# Altium PCB {TEX137}_F2837x_controlCARD_R1.3_PCB_PADS.PcbDoc (part 3 of 6)
Units mm, origin at the board's own origin, x right, y up, seen from the top; angles counter-clockwise.
Board outline 105.77 x 51.09 mm, 10 copper layers (Primary Side, Inner Layer 2, Inner Layer 3, Inner Layer 4, Inner Layer 5, Inner Layer 6, Inner Layer 7, Inner Layer 8, Inner Layer 9, Secondary Side), stack 1.634 mm thick; 292 components, 317 nets, 1400 pads, 1032 vias.
Unrouted connection lines stored in the file: 106.
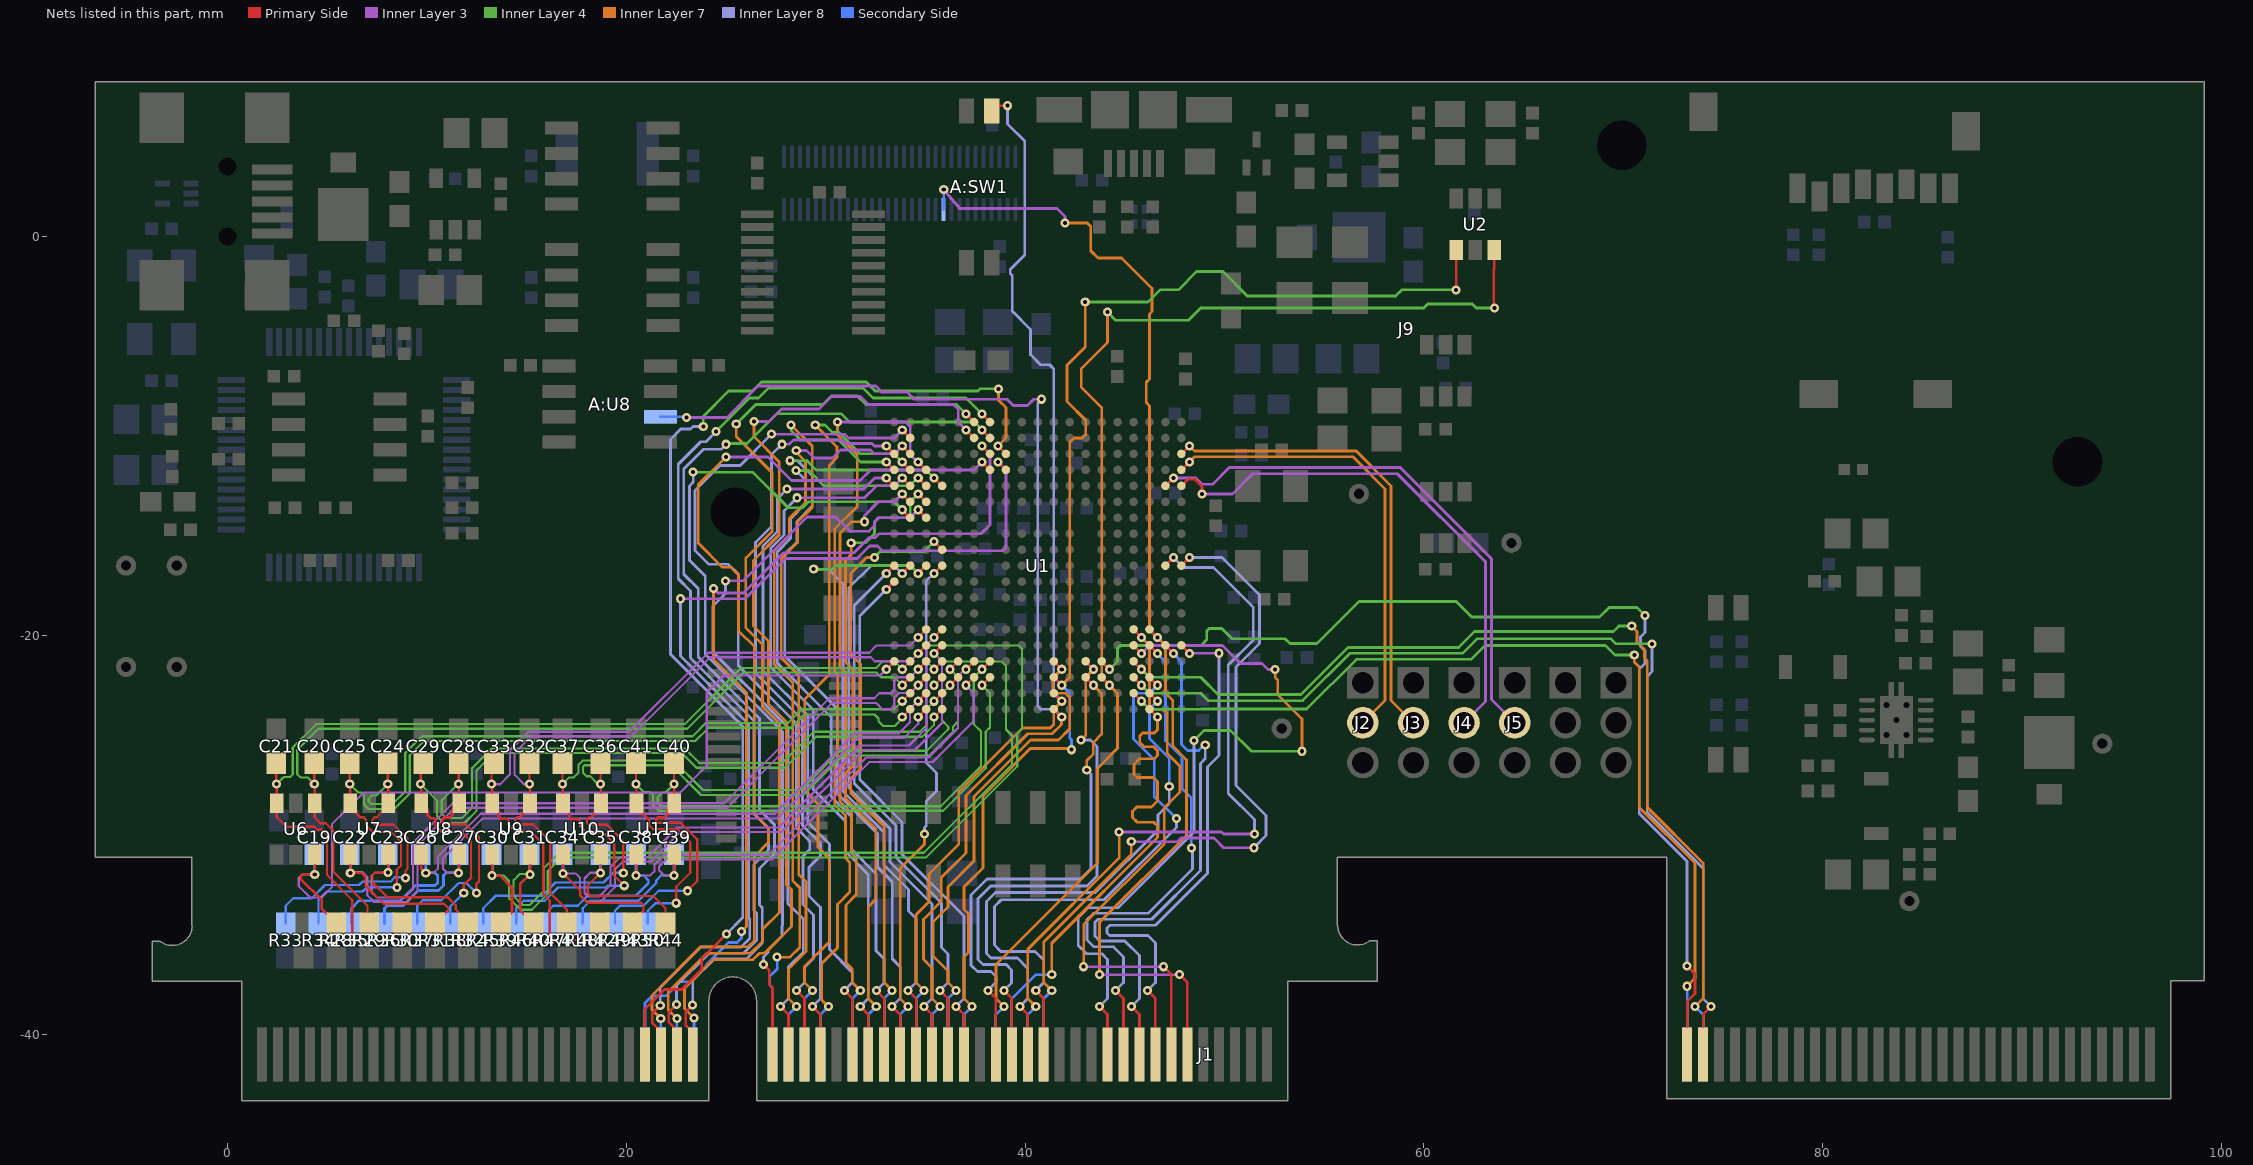
[diagram p11: the nets of this part, all layers, seen from the top]

## Via types
v1: diameter 0.457, hole 0.203, Primary Side to Secondary Side, 1025 vias
v2: diameter 0.711, hole 0.254, Primary Side to Secondary Side, 7 vias

## Nets (pads, with @x,y where several pads share a name; then routed paths per layer and width w, separated by ;. In a path a pad name is that pad's centre, name@x,y a point inside that pad or via, vN(x,y) a via of type N, cw(c..) or ccw(c..) an arc to the next point about the centre after c; other vN are vias at no path point) (continued)
MCU_ADC-A1: C19.2 R28.2 U1.T1 U6.3 | length 46.1
  Primary Side w0.114: v1(4.379,-32.004) U6.3@4.379,-31.013
  Primary Side w0.135: v1(4.379,-32.004) 4.357,-31.991 3.773,-31.991 3.671,-32.092 3.671,-32.219 4.738,-33.286 4.738,-33.732 R28.2@5.461,-34.455 ; v1(33.04,-21.71) U1.T1@33.44,-21.31
  Inner Layer 3 w0.109: v1(4.379,-32.004) 3.747,-32.004 3.581,-32.17 3.581,-32.588 4.14,-33.147 4.724,-33.147 5.237,-32.634 5.237,-29.487 6.834,-27.889 22.702,-27.889 24.041,-26.55 24.041,-22.873 24.892,-22.022 32.728,-22.022 v1(33.04,-21.71)
  Secondary Side w0.135: C19.2@4.357,-30.989 4.379,-31.519 v1(4.379,-32.004)
MCU_ADC-A2: C20.2 R29.2 U1.U2 U6.4 | length 44.4
  Primary Side w0.114: U6.4@4.379,-28.423 4.379,-29.143 4.662,-29.425 4.936,-29.425 5.322,-29.811 5.322,-31.865 7.024,-33.567 7.024,-34.367 R29.2@7.112,-34.455
  Primary Side w0.135: C20.2@4.357,-26.417 v1(4.357,-27.471) 4.379,-27.493 U6.4@4.379,-28.423 ; v1(33.84,-22.51) U1.U2@34.24,-22.11
  Inner Layer 4 w0.109: v1(4.357,-27.471) 4.026,-27.14 3.67,-27.14 3.505,-26.975 3.505,-25.756 4.572,-24.689 23.063,-24.689 25.883,-21.869 32.537,-21.869 32.778,-22.11 33.44,-22.11 v1(33.84,-22.51)
MCU_ADC-A3: C21.2 R30.2 U1.T2 U6.6 | length 49.7
  Primary Side w0.114: C21.2@2.452,-26.417 v1(2.452,-27.471) 2.479,-27.498 U6.6@2.479,-28.423 ; U6.6@2.479,-28.36 U6.6@2.479,-28.423 ; R30.2@8.763,-34.455 7.873,-35.345 6.516,-35.345 6.262,-35.091 6.262,-33.286 4.992,-32.016 4.992,-30.011 4.738,-29.757 4.511,-29.757 4.357,-29.603 2.96,-29.603 2.479,-29.122 U6.6@2.479,-28.423 ; v1(33.84,-21.71) U1.T2@34.24,-21.31
  Inner Layer 4 w0.109: v1(2.452,-27.471) 2.808,-27.115 3.136,-27.115 3.277,-26.975 3.277,-25.63 4.447,-24.46 22.936,-24.46 25.756,-21.641 32.537,-21.641 32.868,-21.31 33.44,-21.31 v1(33.84,-21.71)
MCU_ADC-A4: C22.2 R31.2 U1.U3 U7.1 | length 45.5
  Primary Side w0.114: U7.1@6.162,-31.013 v1(6.162,-31.916) 6.718,-31.916 6.923,-32.121 6.923,-32.55 7.837,-33.464 10.859,-33.464 11.088,-33.693 11.088,-33.769 10.656,-34.201 10.414,-34.201 R31.2@10.414,-34.455
  Primary Side w0.135: v1(34.64,-22.51) U1.U3@35.04,-22.11
  Inner Layer 3 w0.109: v1(6.162,-31.916) 6.189,-31.889 6.782,-31.889 7.01,-32.118 7.01,-33.038 7.348,-33.376 8.992,-33.376 9.539,-32.829 9.539,-30.518 11.405,-28.651 25.07,-28.651 30.328,-23.393 32.524,-23.393 32.842,-23.711 33.312,-23.711 33.44,-23.583 33.44,-23.151 33.694,-22.897 34.253,-22.897 v1(34.64,-22.51)
  Secondary Side w0.135: C22.2@6.135,-30.989 6.162,-31.016 v1(6.162,-31.916)
MCU_ADC-A5: C23.2 R32.2 U1.T3 U7.3 | length 45.1
  Primary Side w0.114: U7.3@8.062,-31.013 v1(8.062,-31.905) 8.062,-31.915 7.405,-31.915 7.278,-32.042 7.278,-32.397 8.015,-33.134 11.037,-33.134 11.444,-33.54 11.444,-33.743 12.104,-34.404 12.104,-34.416 R32.2@12.065,-34.455
  Primary Side w0.135: v1(34.64,-21.71) U1.T3@35.04,-21.31
  Inner Layer 3 w0.109: v1(8.062,-31.905) 7.401,-31.905 7.239,-32.067 7.239,-32.905 7.481,-33.147 8.89,-33.147 9.31,-32.727 9.31,-30.416 11.303,-28.423 24.917,-28.423 30.18,-23.16 32.443,-23.16 32.69,-22.913 33.297,-22.913 33.44,-22.771 33.44,-22.275 33.609,-22.106 34.244,-22.106 v1(34.64,-21.71)
  Secondary Side w0.135: C23.2@8.04,-30.989 8.062,-30.989 v1(8.062,-31.905)
MCU_ADC-B0: C24.2 R33.2 U1.V2 U7.4 | length 47
  Primary Side w0.114: C24.2@8.04,-26.417 v1(8.04,-27.471) 8.062,-27.493 U7.4@8.062,-28.423 8.062,-28.563 7.49,-29.135 7.392,-29.135 7.278,-29.249 7.278,-29.376 7.405,-29.503 8.346,-29.503 9.031,-30.187 9.031,-31.711 8.929,-31.813 v1(8.929,-32.169) ; v1(33.84,-23.31) U1.V2@34.24,-22.91
  Inner Layer 4 w0.109: v1(8.04,-27.471) 7.469,-28.043 7.239,-28.043 7.087,-28.195 7.087,-28.346 7.199,-28.459 8.294,-28.459 8.915,-27.837 8.915,-25.908 9.754,-25.07 23.33,-25.07 24.003,-24.397 28.13,-24.397 28.817,-23.71 33.44,-23.71 v1(33.84,-23.31)
  Secondary Side w0.114: R33.2@2.921,-34.455 2.921,-33.567 3.302,-33.186 4.23,-33.186 4.891,-32.525 6.604,-32.525 6.782,-32.346 8.192,-32.346 8.396,-32.143 8.904,-32.143 v1(8.929,-32.169)
MCU_ADC-B1: C25.2 R34.2 U1.W2 U7.6 | length 46.1
  Primary Side w0.114: C25.2@6.135,-26.417 v1(6.135,-27.471) 6.162,-27.498 U7.6@6.162,-28.423 6.162,-28.641 6.643,-29.122 6.821,-29.122 6.948,-29.249 6.948,-29.527 7.278,-29.857 8.218,-29.857 8.7,-30.34 8.7,-31.559 8.497,-31.762 v1(8.497,-32.651) ; v1(33.84,-24.11) U1.W2@34.24,-23.71
  Inner Layer 4 w0.109: v1(6.135,-27.471) 6.553,-27.889 6.706,-27.889 6.846,-28.03 6.846,-28.487 7.073,-28.714 8.37,-28.714 9.144,-27.94 9.144,-26.023 9.869,-25.298 23.47,-25.298 24.13,-24.638 28.27,-24.638 28.931,-23.978 32.449,-23.978 32.653,-24.181 32.653,-24.321 32.88,-24.549 33.465,-24.549 33.872,-24.142 v1(33.84,-24.11)
  Secondary Side w0.114: R34.2@4.572,-34.455 4.572,-33.274 4.991,-32.855 6.769,-32.855 6.985,-32.639 8.485,-32.639 v1(8.497,-32.651)
MCU_ADC-B2: C26.2 R35.2 U1.V3 U8.1 | length 38.2
  Primary Side w0.135: U8.1@9.718,-31.013 9.718,-31.689 v1(9.945,-31.916) ; v1(34.64,-23.31) U1.V3@35.04,-22.91
  Inner Layer 3 w0.109: v1(9.945,-31.916) 10.351,-31.916 10.555,-31.713 10.555,-31.103 12.702,-28.956 27.432,-28.956 31.471,-24.917 33.681,-24.917 34.227,-24.371 34.227,-23.686 34.604,-23.31 v1(34.64,-23.31)
  Secondary Side w0.135: R35.2@6.223,-34.455 6.223,-33.694 6.604,-33.313 8.675,-33.313 9.437,-32.551 10.414,-32.551 10.541,-32.424 10.541,-32.043 10.414,-31.916 v1(9.945,-31.916) 9.945,-31.243 C26.2@9.691,-30.989
MCU_ADC-B3: C27.2 R36.2 U1.W3 U8.3 | length 36.3
  Primary Side w0.135: v1(11.596,-31.916) 11.618,-31.894 U8.3@11.618,-31.013 ; v1(34.64,-24.11) U1.W3@35.04,-23.71
  Inner Layer 3 w0.109: v1(11.596,-31.916) 11.013,-31.916 10.809,-31.711 10.809,-31.178 12.802,-29.185 27.584,-29.185 31.623,-25.146 33.937,-25.146 34.64,-24.443 v1(34.64,-24.11)
  Secondary Side w0.135: R36.2@7.874,-34.455 7.874,-33.694 8.001,-33.567 8.802,-33.567 9.564,-32.805 10.58,-32.805 10.834,-32.551 10.834,-32.043 10.961,-31.916 v1(11.596,-31.916) C27.2@11.596,-30.989
MCU_ADC-B4: C28.2 R37.2 U1.V4 U8.4 | length 44.9
  Primary Side w0.114: v1(11.596,-27.471) 11.618,-27.493 U8.4@11.618,-28.423 ; 11.952,-29.476 12.612,-30.137 12.612,-32.346 12.485,-32.473 v1(12.485,-32.932) ; v1(35.44,-23.31) U1.V4@35.84,-22.91
  Primary Side w0.135: v1(11.596,-27.471) C28.2@11.596,-26.417 ; U8.4@11.618,-28.423 11.291,-28.749 11.291,-29.019 11.164,-29.146 10.859,-29.146 10.783,-29.222 10.783,-29.41 10.849,-29.476 11.952,-29.476
  Inner Layer 4 w0.109: v1(11.596,-27.471) 11.569,-27.444 10.744,-28.269 10.744,-28.955 10.961,-29.171 11.748,-29.171 12.268,-28.651 12.268,-26.67 13.259,-25.679 22.936,-25.679 23.66,-26.403 27.833,-26.403 29.395,-24.841 34.722,-24.841 35.04,-24.523 35.04,-23.71 v1(35.44,-23.31)
  Secondary Side w0.114: R37.2@9.525,-34.455 9.525,-33.567 9.798,-33.294 10.727,-33.294 11.596,-32.424 11.977,-32.424 v1(12.485,-32.932)
MCU_ADC-B5: C29.2 R38.2 U1.W4 U8.6 | length 42.2
  Primary Side w0.114: v1(9.691,-27.471) 9.718,-27.498 U8.6@9.718,-28.423 ; 11.723,-29.832 12.218,-30.327 12.218,-32.169 ; v1(35.44,-24.11) U1.W4@35.84,-23.71
  Primary Side w0.135: v1(9.691,-27.471) 9.691,-26.417 C29.2@9.818,-26.417 ; U8.6@9.718,-28.423 10.021,-28.726 10.021,-29.019 10.174,-29.171 10.351,-29.171 10.453,-29.273 10.453,-29.603 10.682,-29.832 11.723,-29.832 ; v1(11.85,-32.932) 11.85,-32.537 12.218,-32.169
  Inner Layer 4 w0.109: v1(9.691,-27.471) 10.516,-28.296 10.516,-29.088 10.841,-29.413 11.887,-29.413 12.497,-28.804 12.497,-26.765 13.354,-25.908 22.784,-25.908 23.52,-26.645 27.966,-26.645 29.515,-25.095 34.836,-25.095 35.44,-24.491 v1(35.44,-24.11)
  Secondary Side w0.114: R38.2@11.176,-34.455 11.176,-33.606 v1(11.85,-32.932)
MCU_ADC-C2: C32.2 R41.2 U1.R3 U9.4 | length 35
  Primary Side w0.114: C32.2@15.152,-26.417 v1(15.152,-27.471) 15.174,-27.493 U9.4@15.174,-28.423 14.873,-28.724 14.873,-28.917 14.669,-29.121 14.542,-29.121 14.441,-29.222 14.441,-29.375 14.542,-29.476 15.33,-29.476 16.186,-30.332 16.186,-32.923 17.018,-33.755 R41.2@17.018,-34.455 ; v1(34.64,-20.91) U1.R3@35.04,-20.51
  Inner Layer 3 w0.109: v1(15.152,-27.471) 14.874,-27.471 14.402,-26.999 14.402,-25.908 15.24,-25.07 20.244,-25.07 24.206,-21.107 32.258,-21.107 32.461,-21.31 34.24,-21.31 v1(34.64,-20.91)
MCU_ADC-C3: C33.2 R42.2 U1.P3 U9.6 | length 39.7
  Primary Side w0.114: C33.2@13.374,-26.417 13.247,-26.544 v1(13.247,-27.471) 13.274,-27.498 U9.6@13.274,-28.423 13.577,-28.726 13.577,-29.07 13.704,-29.197 14.009,-29.197 14.085,-29.273 14.085,-29.502 14.39,-29.806 15.177,-29.806 15.838,-30.467 15.838,-32.981 16.168,-33.312 16.168,-35.052 16.422,-35.306 18.581,-35.306 18.669,-35.218 R42.2@18.669,-34.455 ; v1(34.64,-20.11) U1.P3@35.04,-19.71
  Inner Layer 3 w0.109: v1(13.247,-27.471) 13.677,-27.471 14.173,-26.975 14.173,-25.756 15.088,-24.841 20.142,-24.841 24.105,-20.879 32.182,-20.879 32.55,-20.51 34.24,-20.51 v1(34.64,-20.11)
MCU_ADC-C4: C34.2 R43.2 U1.R4 U10.1 | length 36.5
  Primary Side w0.114: U10.1@16.83,-31.013 v1(16.83,-31.943) 17.692,-32.805 17.692,-33.059 18.046,-33.413 20.74,-33.413 20.867,-33.54 20.867,-33.821 20.276,-34.412 R43.2@20.32,-34.455
  Primary Side w0.135: v1(35.44,-20.91) U1.R4@35.84,-20.51
  Inner Layer 3 w0.109: v1(16.83,-31.943) 17.465,-31.943 17.678,-32.156 17.678,-33.034 17.998,-33.353 18.725,-33.353 19.431,-32.647 19.431,-31.75 19.826,-31.356 21.223,-31.356 22.708,-29.87 27.788,-29.87 31.902,-25.756 34.481,-25.756 35.837,-24.4 35.837,-21.307 v1(35.44,-20.91)
  Secondary Side w0.135: C34.2@16.803,-30.989 16.83,-31.016 v1(16.83,-31.943)
MCU_ADC-C5: C35.2 R44.2 U1.P4 U10.3 | length 36.3
  Primary Side w0.114: U10.3@18.73,-31.013 18.708,-31.035 v1(18.708,-31.916) 18.073,-32.551 18.073,-32.932 18.224,-33.083 21.36,-33.083 21.971,-33.694 R44.2@21.971,-34.455
  Primary Side w0.135: v1(35.44,-20.11) U1.P4@35.84,-19.71
  Inner Layer 3 w0.109: v1(18.708,-31.916) 18.187,-31.916 17.907,-32.196 17.907,-32.93 18.085,-33.108 18.631,-33.108 19.202,-32.537 19.202,-31.623 19.698,-31.127 21.085,-31.127 22.571,-29.642 27.635,-29.642 31.75,-25.527 34.181,-25.527 35.04,-24.668 35.04,-20.51 v1(35.44,-20.11)
  Secondary Side w0.135: v1(18.708,-31.916) C35.2@18.708,-30.989
MCU_ADC-D0: C36.2 R45.2 U1.T5 U10.4 | length 41.8
  Primary Side w0.114: C36.2@18.708,-26.417 v1(18.708,-27.471) 18.73,-27.493 U10.4@18.73,-28.423 18.73,-28.816 18.403,-28.816 18.403,-28.968 18.225,-29.146 18.124,-29.146 18.029,-29.241 18.029,-29.406 18.124,-29.502 19.038,-29.502 19.851,-30.314 v1(19.851,-31.916) ; v1(36.24,-21.71) U1.T5@36.64,-21.31
  Inner Layer 4 w0.109: v1(18.708,-27.471) 18.681,-27.444 18.556,-27.444 18.187,-27.076 18.008,-27.076 17.831,-26.899 17.831,-26.594 17.907,-26.518 22.25,-26.518 23.749,-28.016 28.862,-28.016 30.841,-26.037 35.177,-26.037 36.393,-24.821 36.393,-24.577 36.64,-24.329 36.64,-22.111 v1(36.24,-21.71)
  Secondary Side w0.114: R45.2@12.827,-34.455 12.827,-33.694 13.462,-33.059 15.787,-33.059 16.449,-32.397 18.862,-32.397 19.343,-31.916 v1(19.851,-31.916)
MCU_ADC-D1: C37.2 R46.2 U1.U5 U10.6 | length 39.8
  Primary Side w0.114: C37.2@16.803,-26.417 v1(16.803,-27.471) 16.83,-27.498 U10.6@16.83,-28.423 17.133,-28.726 17.133,-29.095 17.26,-29.222 17.59,-29.222 17.692,-29.324 17.692,-29.578 17.997,-29.883 18.834,-29.883 19.394,-30.443 19.394,-32.057 v1(19.899,-32.562) ; v1(36.24,-22.51) U1.U5@36.64,-22.11
  Inner Layer 4 w0.109: v1(16.803,-27.471) 17.146,-27.128 17.373,-27.128 17.602,-26.899 17.602,-26.498 17.812,-26.289 22.377,-26.289 23.851,-27.762 28.755,-27.762 30.724,-25.793 35.067,-25.793 36.144,-24.716 36.144,-24.587 35.837,-24.28 35.837,-22.913 v1(36.24,-22.51)
  Secondary Side w0.114: R46.2@14.478,-34.455 14.478,-33.694 14.859,-33.313 15.914,-33.313 16.576,-32.651 18.987,-32.651 19.076,-32.562 v1(19.899,-32.562)
MCU_ADC-D2: C38.2 R47.2 U1.T6 U11.1 | length 32.3
  Primary Side w0.114: v1(20.486,-32.043) 20.513,-32.016 U11.1@20.513,-31.013 ; v1(37.04,-21.71) U1.T6@37.44,-21.31
  Inner Layer 3 w0.109: v1(20.486,-32.043) 21.209,-32.043 21.412,-31.84 21.412,-31.508 21.907,-31.013 27.153,-31.013 32.029,-26.137 35.154,-26.137 36.64,-24.65 36.64,-22.061 36.991,-21.71 v1(37.04,-21.71)
  Secondary Side w0.114: R47.2@16.129,-34.455 16.129,-33.771 16.333,-33.567 17.565,-33.567 18.073,-33.059 20.486,-33.059 21.121,-32.424 21.121,-32.297 20.867,-32.043 v1(20.486,-32.043)
  Secondary Side w0.135: v1(20.486,-32.043) C38.2@20.486,-30.989
MCU_ADC-D3: C39.2 R48.2 U1.U6 U11.3 | length 30.6
  Primary Side w0.114: v1(22.391,-32.043) 22.413,-32.021 U11.3@22.413,-31.013 ; v1(37.04,-22.51) U1.U6@37.44,-22.11
  Inner Layer 3 w0.109: v1(22.391,-32.043) 21.895,-32.043 21.641,-31.789 21.641,-31.609 22.008,-31.242 27.305,-31.242 32.182,-26.365 35.357,-26.365 37.397,-24.325 37.397,-24.264 37.428,-24.234 37.428,-22.898 v1(37.04,-22.51)
  Secondary Side w0.114: R48.2@17.78,-34.455 17.819,-34.416 17.819,-33.694 18.2,-33.313 20.613,-33.313 21.502,-32.424 21.502,-32.297 21.756,-32.043 v1(22.391,-32.043)
  Secondary Side w0.135: v1(22.391,-32.043) C39.2@22.391,-30.989
MCU_ADC-D4: C40.2 R49.2 U1.T7 U11.4 | length 37.7
  Primary Side w0.114: C40.2@22.391,-26.417 v1(22.391,-27.471) 22.413,-27.471 U11.4@22.413,-28.423 ; 22.721,-29.4 23.559,-30.238 23.559,-32.321 v1(23.063,-32.817) ; v1(37.84,-21.71) U1.T7@38.24,-21.31
  Primary Side w0.135: U11.4@22.413,-28.423 22.086,-28.749 22.086,-28.968 21.908,-29.146 21.578,-29.146 21.502,-29.222 21.502,-29.349 21.554,-29.4 22.721,-29.4
  Inner Layer 4 w0.109: v1(22.391,-27.471) 21.973,-27.889 21.807,-27.889 21.578,-28.118 21.578,-28.423 21.731,-28.575 35.777,-28.575 37.795,-26.557 37.795,-24.828 37.428,-24.46 37.428,-22.122 v1(37.84,-21.71)
  Secondary Side w0.114: R49.2@19.431,-34.455 19.431,-33.821 19.685,-33.567 20.867,-33.567 21.629,-32.817 v1(23.063,-32.817)
MCU_ADC-D5: C41.2 R50.2 U1.U7 U11.6 | length 35.6
  Primary Side w0.114: C41.2@20.486,-26.417 v1(20.486,-27.471) 20.513,-27.498 U11.6@20.513,-28.423 20.816,-28.726 20.816,-28.943 21.146,-29.273 21.146,-29.527 21.349,-29.73 22.569,-29.73 23.204,-30.365 23.204,-31.914 22.504,-32.614 v1(22.504,-33.44) ; v1(37.84,-22.51) U1.U7@38.24,-22.11
  Inner Layer 4 w0.109: v1(20.486,-27.471) 20.892,-27.877 21.196,-27.877 21.336,-28.017 21.336,-28.511 21.629,-28.804 35.89,-28.804 38.024,-26.67 38.024,-24.842 38.241,-24.625 38.241,-22.911 v1(37.84,-22.51)
  Secondary Side w0.114: R50.2@21.082,-34.455 21.082,-33.821 21.463,-33.44 v1(22.504,-33.44)
MCU_ADCIN14: C30.2 R39.2 U1.T4 U9.1 | length 49.3
  Primary Side w0.114: v1(13.274,-32.043) U9.1@13.274,-31.013 ; v1(35.44,-21.71) U1.T4@35.84,-21.31
  Primary Side w0.135: v1(13.274,-32.043) 13.286,-32.055 13.665,-32.055 14.275,-32.664 14.275,-33.896 R39.2@13.716,-34.455
  Inner Layer 4 w0.109: v1(13.274,-32.043) 13.843,-32.043 14.122,-32.322 14.122,-33.197 14.694,-33.769 15.265,-33.769 16.066,-32.969 16.066,-31.826 16.751,-31.14 35.039,-31.14 39.604,-26.576 39.604,-24.955 39.84,-24.719 39.84,-20.663 39.688,-20.511 35.217,-20.511 35.039,-20.688 35.039,-21.309 v1(35.44,-21.71)
  Secondary Side w0.114: C30.2@13.247,-30.989 13.274,-31.016 v1(13.274,-32.043)
MCU_ADCIN15: C31.2 R40.2 U1.U4 U9.3 | length 45.8
  Primary Side w0.114: v1(35.44,-22.51) U1.U4@35.84,-22.11
  Primary Side w0.135: U9.3@15.174,-31.013 15.174,-31.902 15.265,-31.902 v1(15.164,-32.004) 14.681,-32.487 14.681,-33.769 R40.2@15.367,-34.455
  Inner Layer 4 w0.109: v1(15.164,-32.004) 15.138,-31.979 14.655,-31.979 14.351,-32.283 14.351,-33.083 14.796,-33.528 15.163,-33.528 15.837,-32.854 15.837,-31.711 16.637,-30.911 34.925,-30.911 39.34,-26.497 39.34,-25.029 39.04,-24.729 39.04,-21.539 38.811,-21.311 36.017,-21.311 35.839,-21.488 35.839,-22.111 v1(35.44,-22.51)
  Secondary Side w0.135: C31.2@15.152,-30.989 15.164,-31.001 v1(15.164,-32.004)
MCU_GPIO-00: J1.49 U1.C8 | length 56.8
  Primary Side w0.135: J1.49@20.935,-41.024 20.935,-38.755 21.92,-37.77 22.76,-37.77 23.788,-36.742 23.788,-36.207 v1(25.02,-34.975) ; v1(38.64,-10.51) U1.C8@39.04,-10.91
  Inner Layer 4 w0.14: v1(23.864,-9.537) 23.864,-9.029 25.134,-7.759 26.339,-7.759 26.789,-7.309 32.036,-7.309 32.486,-7.759 37.63,-7.759 37.743,-7.646 v1(38.671,-7.646)
  Inner Layer 7 w0.14: v1(38.64,-10.51) 39.04,-10.11 39.04,-8.586 38.671,-8.217 v1(38.671,-7.646)
  Inner Layer 8 w0.14: v1(23.864,-9.537) 23.356,-9.537 23.229,-9.664 22.734,-9.664 22.212,-10.186 22.212,-20.955 25.845,-24.587 25.845,-34.151 v1(25.02,-34.975)
MCU_GPIO-01: J1.51 U1.D8 | length 50.3
  Primary Side w0.135: v1(21.705,-38.569) 21.299,-38.976 21.299,-39.429 21.735,-39.865 J1.51@21.735,-41.024 ; v1(38.64,-11.31) U1.D8@39.04,-11.71
  Inner Layer 3 w0.14: v1(22.721,-18.173) 25.961,-18.173 27.979,-16.155 31.571,-16.155 32.195,-15.531 32.601,-15.531 32.83,-15.76 38.887,-15.76 39.04,-15.607 39.04,-11.71 v1(38.64,-11.31)
  Inner Layer 8 w0.14: v1(21.705,-38.569) 21.705,-37.674 23.74,-35.639 25.76,-35.639 26.194,-35.204 26.194,-34.227 26.124,-34.156 26.124,-24.447 22.721,-21.045 v1(22.721,-18.173)
MCU_GPIO-02: J1.53 U1.A7 | length 52.8
  Primary Side w0.135: v1(22.518,-38.519) 22.137,-38.9 22.137,-39.416 22.535,-39.814 J1.53@22.535,-41.024 ; v1(37.84,-8.91) U1.A7@38.24,-9.31
  Inner Layer 4 w0.14: v1(24.499,-9.791) 26.187,-8.103 26.639,-8.103 27.132,-7.609 31.879,-7.609 32.372,-8.103 37.033,-8.103 v1(37.84,-8.91)
  Inner Layer 8 w0.14: v1(22.518,-38.519) 22.518,-37.566 24.137,-35.947 25.884,-35.947 26.543,-35.287 26.543,-33.947 26.403,-33.807 26.403,-31.496 27.127,-30.772 27.127,-29.68 26.403,-28.956 26.403,-24.308 23.229,-21.134 23.229,-17.792 22.607,-17.17 22.607,-11.429 23.737,-10.299 23.991,-10.299 v1(24.499,-9.791)
MCU_GPIO-03: J1.55 U1.B7 | length 51.3
  Primary Side w0.135: v1(23.331,-38.544) 22.99,-38.885 22.99,-39.57 23.335,-39.916 J1.55@23.335,-41.024 ; v1(37.84,-9.71) U1.B7@38.24,-10.11
  Inner Layer 4 w0.14: v1(25.007,-10.426) 25.007,-10.389 26.06,-10.389 27.558,-8.891 30.772,-8.891 31.192,-9.31 37.477,-9.31 v1(37.84,-9.71)
  Inner Layer 8 w0.14: v1(23.331,-38.544) 23.331,-37.325 24.423,-36.233 26.023,-36.233 26.822,-35.433 26.822,-33.668 26.683,-33.528 26.683,-31.699 27.432,-30.95 27.432,-29.502 26.683,-28.753 26.683,-24.168 23.61,-21.095 23.61,-17.665 22.886,-16.941 22.886,-11.658 23.864,-10.68 24.753,-10.68 v1(25.007,-10.426)
MCU_GPIO-04: J1.50 U1.C7 | length 47.2
  Primary Side w0.135: v1(37.84,-10.51) U1.C7@38.24,-10.91
  Inner Layer 3 w0.14: v1(24.372,-17.665) 24.589,-17.882 25.87,-17.882 27.89,-15.863 31.42,-15.863 32.169,-15.113 32.474,-15.113 32.677,-14.91 37.795,-14.91 38.24,-14.465 38.24,-10.91 v1(37.84,-10.51)
  Inner Layer 7 w0.14: v1(24.372,-17.665) 24.372,-21.209 26.035,-22.872 26.035,-34.608 v1(25.776,-34.867)
  Secondary Side w0.135: J1.50@20.937,-41.024 20.937,-39.159 20.943,-39.154 20.943,-38.442 21.299,-38.087 21.985,-38.087 22.696,-37.376 23.204,-37.376 24.017,-36.563 24.017,-36.518 25.128,-35.407 25.56,-35.407 25.776,-35.191 v1(25.776,-34.867)
MCU_GPIO-05: J1.52 U1.D7 | length 50.5
  Primary Side w0.135: v1(37.84,-11.31) U1.D7@38.24,-11.71
  Inner Layer 3 w0.14: v1(25.007,-11.061) 27.114,-11.061 28.296,-12.243 31.725,-12.243 32.258,-11.709 37.441,-11.709 v1(37.84,-11.31)
  Inner Layer 7 w0.14: v1(21.731,-39.23) 21.285,-38.784 21.285,-38.062 23.725,-35.623 26.112,-35.623 26.423,-35.313 26.423,-31.09 27.127,-30.385 27.127,-29.673 26.423,-28.969 26.423,-20.575 25.632,-19.784 25.632,-16.968 25.261,-16.596 24.829,-16.596 23.61,-15.377 23.61,-12.458 24.626,-11.442 v1(25.007,-11.061)
  Secondary Side w0.135: v1(21.731,-39.23) 21.738,-39.237 J1.52@21.738,-41.024
MCU_GPIO-06: J1.54 U1.A6 | length 50.4
  Primary Side w0.135: v1(37.04,-8.91) U1.A6@37.44,-9.31
  Inner Layer 4 w0.14: v1(25.515,-9.41) 26.492,-8.433 29.858,-8.433 30.289,-8.002 31.586,-8.002 32.017,-8.433 36.563,-8.433 v1(37.04,-8.91)
  Inner Layer 7 w0.14: v1(22.543,-39.23) 22.105,-38.792 22.105,-37.89 24.048,-35.947 26.245,-35.947 26.842,-35.351 26.842,-34.748 27.686,-33.904 27.686,-24.432 26.839,-23.585 26.839,-20.473 25.997,-19.631 25.997,-16.132 27.321,-14.809 27.321,-11.851 25.515,-10.045 v1(25.515,-9.41)
  Secondary Side w0.135: J1.54@22.538,-41.024 22.538,-39.236 v1(22.543,-39.23)
MCU_GPIO-07: J1.56 U1.B6 | length 50.2
  Primary Side w0.135: v1(37.04,-9.71) U1.B6@37.44,-10.11
  Inner Layer 3 w0.14: v1(26.404,-9.283) 27.166,-9.283 27.789,-8.66 29.657,-8.66 30.29,-8.027 31.733,-8.027 32.14,-8.433 36.398,-8.433 36.652,-8.687 36.652,-9.322 v1(37.04,-9.71)
  Inner Layer 7 w0.14: v1(23.406,-39.205) 22.924,-38.722 22.924,-37.706 24.36,-36.271 26.353,-36.271 26.677,-35.948 26.943,-35.948 28.283,-34.607 28.283,-32.765 28.042,-32.523 28.042,-24.359 27.128,-23.446 27.128,-20.295 26.378,-19.545 26.378,-16.257 27.674,-14.961 27.674,-11.315 26.404,-10.045 v1(26.404,-9.283)
  Secondary Side w0.135: J1.56@23.335,-41.024 23.394,-41.024 23.394,-39.21 v1(23.406,-39.205)
MCU_GPIO-08: J1.57 U1.G2 | length 43.9
  Primary Side w0.135: v1(26.888,-36.512) 27.164,-36.794 27.164,-37.503 27.335,-37.674 J1.57@27.335,-41.024 ; v1(33.84,-13.71) U1.G2@34.24,-14.11
  Inner Layer 4 w0.14: v1(23.356,-11.823) 26.339,-11.823 28.126,-13.61 28.839,-13.61 29.139,-13.31 33.44,-13.31 v1(33.84,-13.71)
  Inner Layer 8 w0.14: v1(23.356,-11.823) 23.356,-12.331 23.166,-12.522 23.166,-16.243 23.966,-17.043 23.966,-20.96 27.836,-24.831 27.836,-34.56 27.813,-34.583 27.813,-35.077 27.102,-35.789 27.102,-35.917 26.888,-36.131 v1(26.888,-36.512)
MCU_GPIO-09: J1.59 U1.G3 | length 38.9
  Primary Side w0.135: v1(27.735,-38.623) 28.135,-39.023 J1.59@28.135,-41.024 ; v1(34.64,-13.71) U1.G3@35.04,-14.11
  Inner Layer 3 w0.14: v1(24.981,-17.273) 25.857,-17.273 29.062,-14.068 30.499,-14.068 31.215,-14.783 32.166,-14.783 32.44,-14.51 32.44,-14.31 32.64,-14.11 34.24,-14.11 v1(34.64,-13.71)
  Inner Layer 8 w0.14: v1(24.981,-17.273) 24.981,-17.908 24.346,-18.543 24.346,-20.854 28.106,-24.614 28.106,-33.465 28.88,-34.238 28.88,-35.882 28.135,-36.627 28.135,-38.223 v1(27.735,-38.623)
MCU_GPIO-10: J1.61 U1.B2 | length 44.5
  Primary Side w0.135: v1(28.535,-37.823) 28.935,-38.223 J1.61@28.935,-41.024 ; v1(33.84,-9.71) U1.B2@34.24,-10.11
  Inner Layer 3 w0.14: v1(27.293,-9.918) 30.951,-9.918 31.143,-10.11 33.44,-10.11 v1(33.84,-9.71)
  Inner Layer 8 w0.14: v1(27.293,-9.918) 25.718,-11.493 24.702,-11.493 23.445,-12.75 23.445,-15.747 24.143,-16.446 25.12,-16.446 25.616,-16.942 25.616,-21.514 28.538,-24.436 28.538,-29.655 29.197,-30.315 29.197,-30.75 28.863,-31.084 28.863,-33.509 29.388,-34.033 29.388,-36.2 28.935,-36.652 28.935,-37.423 v1(28.535,-37.823)
MCU_GPIO-11: J1.63 U1.C1 | length 39.3
  Primary Side w0.135: v1(29.335,-38.623) 29.735,-39.023 J1.63@29.735,-41.024 ; v1(33.04,-10.51) U1.C1@33.44,-10.91
  Inner Layer 3 w0.14: v1(27.801,-10.426) 28.168,-10.426 28.384,-10.21 30.779,-10.21 30.96,-10.39 32.32,-10.39 32.44,-10.51 v1(33.04,-10.51)
  Inner Layer 8 w0.14: v1(27.801,-10.426) 27.28,-10.947 27.28,-14.542 26.48,-15.342 26.48,-21.895 28.836,-24.251 28.836,-29.534 29.735,-30.434 29.735,-31.058 29.158,-31.635 29.158,-33.069 29.735,-33.647 29.735,-38.223 v1(29.335,-38.623)
MCU_GPIO-12: J1.58 U1.C2 | length 39.2
  Primary Side w0.135: v1(33.84,-10.51) U1.C2@34.24,-10.91
  Inner Layer 3 w0.14: v1(28.525,-10.732) 29.033,-10.732 29.414,-11.113 30.34,-11.113 30.743,-10.71 32.253,-10.71 32.447,-10.904 33.446,-10.904 v1(33.84,-10.51)
  Inner Layer 7 w0.14: v1(27.559,-36.144) 28.212,-36.144 28.702,-35.654 28.702,-32.664 28.346,-32.309 28.346,-22.365 27.42,-21.439 27.42,-15.748 28.177,-14.991 28.177,-14.159 28.995,-13.34 28.995,-11.291 28.563,-10.859 28.563,-10.77 v1(28.525,-10.732)
  Secondary Side w0.135: J1.58@27.335,-41.024 27.335,-37.68 27.166,-37.512 27.166,-37.147 27.573,-36.741 27.573,-36.17 v1(27.559,-36.144)
MCU_GPIO-13: J1.60 U1.D1 | length 40.1
  Primary Side w0.135: v1(33.04,-11.31) U1.D1@33.44,-11.71
  Inner Layer 4 w0.14: v1(28.271,-9.462) 28.271,-9.729 28.752,-10.21 30.64,-10.21 31.74,-11.31 v1(33.04,-11.31)
  Inner Layer 7 w0.14: v1(28.271,-9.462) 29.325,-10.516 29.325,-13.585 28.596,-14.315 28.596,-15.36 27.775,-16.18 27.775,-21.133 28.651,-22.009 28.651,-32.005 29.007,-32.357 29.007,-35.865 28.135,-36.737 28.135,-38.223 v1(28.535,-38.623)
  Secondary Side w0.135: J1.60@28.135,-41.024 28.135,-39.023 v1(28.535,-38.623)
MCU_GPIO-14: J1.62 U1.D2 | length 39.7
  Primary Side w0.135: v1(33.84,-11.31) U1.D2@34.24,-11.71
  Inner Layer 4 w0.14: v1(29.478,-9.462) 29.974,-9.462 30.342,-9.83 30.671,-9.83 31.745,-10.904 33.434,-10.904 v1(33.84,-11.31)
  Inner Layer 7 w0.14: 28.935,-37.423 28.935,-36.622 30.182,-35.376 30.182,-31.184 29.616,-30.618 29.616,-28.458 28.956,-27.798 28.956,-23.197 30.182,-21.971 30.182,-11.481 30.57,-11.093 30.57,-10.554 v1(29.478,-9.462) ; 28.935,-37.423 v1(29.335,-37.823)
  Secondary Side w0.135: J1.62@28.935,-41.024 28.935,-38.223 ; 28.935,-38.223 v1(29.335,-37.823)
MCU_GPIO-15: J1.64 U1.D3 | length 40.2
  Primary Side w0.135: v1(34.64,-11.31) U1.D3@35.04,-11.71
  Inner Layer 3 w0.14: v1(30.595,-9.31) 34.027,-9.31 34.24,-9.523 34.24,-10.948 v1(34.64,-11.31)
  Inner Layer 7 w0.14: v1(30.135,-38.623) 29.804,-38.292 29.804,-36.465 30.594,-35.674 30.594,-33.496 31.208,-32.883 31.208,-31.399 30.988,-31.18 30.988,-29.032 30.451,-28.495 30.451,-26.416 30.607,-26.26 30.607,-22 30.451,-21.844 30.451,-14.681 31.586,-13.546 31.586,-10.947 30.595,-9.957 v1(30.595,-9.31)
  Secondary Side w0.135: J1.64@29.735,-41.024 29.735,-39.023 ; 29.735,-39.023 v1(30.135,-38.623)
MCU_GPIO-16: J1.67 U1.E1 | length 36.8
  Primary Side w0.135: v1(30.936,-37.823) 31.335,-38.223 J1.67@31.335,-41.024 ; v1(33.04,-12.11) U1.E1@33.44,-12.51
  Inner Layer 3 w0.14: v1(28.067,-12.675) 31.897,-12.675 32.461,-12.11 v1(33.04,-12.11)
  Inner Layer 8 w0.14: v1(28.067,-12.675) 27.585,-13.157 27.585,-14.796 26.861,-15.52 26.861,-21.794 29.105,-24.038 29.105,-29.384 30.187,-30.467 30.187,-35.751 31.336,-36.899 31.336,-37.423 v1(30.936,-37.823)
MCU_GPIO-17: J1.69 U1.E2 | length 37.1
  Primary Side w0.135: v1(31.736,-38.623) 32.135,-39.023 J1.69@32.135,-41.024 ; v1(33.84,-12.11) U1.E2@34.24,-12.51
  Inner Layer 3 w0.14: v1(28.563,-13.11) 29.095,-13.11 29.098,-13.106 31.955,-13.106 32.551,-12.51 33.44,-12.51 v1(33.84,-12.11)
  Inner Layer 8 w0.14: v1(28.563,-13.11) 27.91,-13.763 27.91,-14.979 27.242,-15.647 27.242,-21.591 29.374,-23.723 29.374,-27.74 29.395,-27.74 30.987,-29.332 30.987,-30.847 32.136,-31.996 32.136,-38.223 v1(31.736,-38.623)
MCU_GPIO-18: J1.71 U1.E3 | length 39.8
  Primary Side w0.135: v1(32.549,-37.824) 32.935,-38.21 J1.71@32.935,-41.024 ; v1(34.64,-12.11) U1.E3@35.04,-12.51
  Inner Layer 4 w0.14: v1(28.512,-11.735) 29.158,-11.735 29.92,-12.51 34.202,-12.51 v1(34.64,-12.11)
  Inner Layer 8 w0.14: v1(28.512,-11.735) 28.995,-12.217 28.995,-13.404 28.24,-14.159 28.24,-15.157 27.572,-15.825 27.572,-21.387 30.277,-24.092 30.277,-28.09 31.291,-29.104 31.291,-30.733 32.526,-31.967 32.526,-35.823 32.926,-36.223 32.926,-37.448 v1(32.549,-37.824)
MCU_GPIO-19: J1.73 U1.E4 | length 41.9
  Primary Side w0.135: v1(33.336,-38.623) 33.735,-39.023 J1.73@33.735,-41.024 ; v1(35.44,-12.11) U1.E4@35.84,-12.51
  Inner Layer 4 w0.14: v1(28.22,-11.25) 28.42,-11.25 29.051,-11.24 29.52,-11.709 35.039,-11.709 v1(35.44,-12.11)
  Inner Layer 8 w0.14: v1(28.22,-11.25) 28.42,-11.25 28.587,-11.25 29.325,-11.988 29.325,-13.529 28.558,-14.296 28.558,-15.322 27.944,-15.936 27.944,-21.032 30.582,-23.67 30.582,-27.94 32.614,-29.972 32.614,-31.636 33.338,-32.361 33.338,-36.226 33.736,-36.623 33.736,-38.223 v1(33.336,-38.623)
MCU_GPIO-20: J1.68 U1.F2 | length 32.1
  Primary Side w0.135: v1(33.84,-12.91) U1.F2@34.24,-13.31
  Inner Layer 3 w0.14: v1(31.94,-14.31) 31.94,-14.01 32.64,-13.31 33.441,-13.31 v1(33.84,-12.91)
  Inner Layer 7 w0.14: v1(31.736,-37.823) 31.336,-37.423 31.335,-36.741 31.013,-36.419 31.013,-33.532 31.53,-33.015 31.53,-31.163 31.293,-30.926 31.293,-28.918 30.72,-28.345 30.72,-26.67 30.988,-26.402 30.988,-21.858 30.72,-21.59 30.72,-14.885 31.295,-14.31 v1(31.94,-14.31)
  Secondary Side w0.135: J1.68@31.335,-41.024 31.335,-38.223 ; 31.336,-38.223 v1(31.736,-37.823)
MCU_GPIO-21: J1.70 U1.F3 | length 32.9
  Primary Side w0.135: v1(34.64,-12.91) U1.F3@35.04,-13.31
  Inner Layer 4 w0.14: v1(31.28,-15.368) 31.992,-15.368 32.449,-14.91 32.449,-14.339 32.677,-14.11 34.113,-14.11 34.24,-13.983 34.24,-13.31 v1(34.64,-12.91)
  Inner Layer 7 w0.14: v1(31.28,-15.368) 31.28,-15.966 30.99,-16.257 30.99,-21.336 31.369,-21.715 31.369,-26.545 30.99,-26.924 30.99,-28.199 31.979,-29.184 32.512,-29.717 32.512,-33.256 32.138,-33.63 32.138,-38.22 v1(32.536,-38.623)
  Secondary Side w0.135: J1.70@32.135,-41.024 32.135,-39.023 ; 32.136,-39.023 v1(32.536,-38.623)
MCU_GPIO-22: J1.72 U1.J4 | length 31
  Primary Side w0.135: v1(35.44,-15.31) U1.J4@35.84,-15.71
  Inner Layer 4 w0.14: v1(32.44,-16.11) 32.74,-15.81 34.939,-15.81 v1(35.44,-15.31)
  Inner Layer 7 w0.14: v1(32.44,-16.11) 32.049,-16.11 31.259,-16.9 31.259,-20.955 31.75,-21.446 31.75,-26.687 31.259,-27.178 31.259,-27.906 32.935,-29.583 32.935,-37.423 ; 32.936,-37.423 v1(33.336,-37.823)
  Secondary Side w0.135: J1.72@32.935,-41.024 32.935,-38.223 ; 32.936,-38.223 v1(33.336,-37.823)
MCU_GPIO-23: J1.74 U1.K4 | length 26.2
  Primary Side w0.135: v1(35.44,-16.91) U1.K4@35.84,-16.51
  Inner Layer 7 w0.14: v1(34.136,-38.623) 33.736,-38.223 33.736,-31.699 34.95,-30.485 v1(34.95,-29.972)
  Inner Layer 8 w0.14: v1(34.95,-29.972) 34.95,-29.655 35.04,-29.566 35.04,-28.346 35.56,-27.826 35.56,-26.911 35.04,-26.391 35.04,-17.285 v1(35.44,-16.91)
  Secondary Side w0.135: J1.74@33.736,-41.024 33.736,-39.023 ; 33.736,-39.023 v1(34.136,-38.623)
MCU_GPIO-24: J1.75 U1.K3 | length 33.3
  Primary Side w0.135: v1(34.136,-37.823) 34.535,-38.222 J1.75@34.535,-41.024 ; v1(34.64,-16.91) U1.K3@35.04,-16.51
  Inner Layer 4 w0.14: v1(29.401,-16.688) 30.341,-16.688 30.518,-16.511 34.241,-16.511 v1(34.64,-16.91)
  Inner Layer 8 w0.14: v1(29.401,-16.688) 30.137,-16.688 30.874,-17.425 30.874,-27.838 32.918,-29.883 32.918,-31.521 34.151,-32.754 34.151,-33.823 34.536,-34.207 34.536,-37.423 v1(34.136,-37.823)
MCU_GPIO-25: J1.77 U1.K2 | length 29.3
  Primary Side w0.135: v1(33.84,-16.91) U1.K2@34.24,-16.51 ; v1(34.936,-38.623) 35.335,-39.022 J1.77@35.335,-41.024
  Inner Layer 8 w0.14: v1(33.84,-16.91) 33.428,-16.498 32.296,-16.498 31.153,-17.641 31.153,-27.635 33.223,-29.705 33.223,-31.368 35.336,-33.48 35.336,-38.223 v1(34.936,-38.623)
MCU_GPIO-26: J1.79 U1.K1 | length 27.6
  Primary Side w0.135: v1(33.04,-16.91) U1.K1@33.44,-16.51 ; v1(35.736,-37.823) 36.135,-38.222 J1.79@36.135,-41.024
  Inner Layer 8 w0.14: v1(33.04,-16.91) 31.432,-18.518 31.432,-27.444 33.528,-29.54 33.528,-31.139 35.814,-33.425 35.814,-35.659 36.136,-35.98 36.136,-37.423 v1(35.736,-37.823)
MCU_GPIO-27: J1.81 U1.L1 | length 26.9
  Primary Side w0.135: v1(33.04,-17.711) U1.L1@33.44,-17.31 ; v1(36.536,-38.623) 36.935,-39.022 J1.81@36.935,-41.024
  Inner Layer 8 w0.14: v1(33.04,-17.711) 31.712,-19.039 31.712,-27.241 33.833,-29.362 33.833,-30.987 36.936,-34.09 36.936,-38.223 v1(36.536,-38.623)
MCU_GPIO-28: A:SW1.3 J1.76 U1.V11 | length 55.4
  Primary Side w0.135: A:SW1.3@38.325,6.29 38.325,6.552 v1(39.121,6.552) ; U1.V11@41.44,-22.91 v1(41.84,-23.31)
  Inner Layer 7 w0.14: v1(34.936,-37.823) 34.536,-37.423 34.53,-34.016 35.183,-33.364 35.183,-31.97 36.678,-30.475 36.678,-27.839 39.866,-24.651 41.262,-24.651 41.44,-24.472 41.44,-23.715 41.82,-23.336 v1(41.84,-23.31)
  Inner Layer 8 w0.14: v1(39.121,6.552) 39.121,5.643 39.985,4.78 39.985,-0.937 39.257,-1.665 39.257,-1.868 39.358,-1.969 39.358,-3.747 40.273,-4.662 40.273,-5.932 40.781,-6.44 41.237,-6.44 41.44,-6.643 41.44,-22.91 v1(41.84,-23.31)
  Secondary Side w0.135: J1.76@34.536,-41.024 34.536,-38.223 v1(34.936,-37.823)
MCU_GPIO-29_L: A:U8.3 J1.78 U1.W11 | length 58.8
  Primary Side w0.135: U1.W11@41.44,-23.71 v1(41.84,-24.11)
  Inner Layer 3 w0.14: v1(23.026,-9.08) 25.044,-9.08 26.615,-7.509 32.515,-7.509 32.815,-7.809 34.084,-7.809 34.44,-8.166 39.09,-8.166 39.409,-8.484 40.118,-8.484 40.437,-8.166 v1(40.831,-8.166)
  Inner Layer 7 w0.14: v1(35.736,-38.623) 35.336,-38.223 35.336,-36.684 34.902,-36.25 34.902,-34.249 35.793,-33.358 35.793,-32.16 37.04,-30.913 37.04,-28.035 40.132,-24.943 41.352,-24.943 41.822,-24.472 41.822,-24.128 v1(41.84,-24.11)
  Inner Layer 8 w0.14: v1(40.831,-8.166) 40.64,-8.357 40.64,-23.57 40.781,-23.711 41.441,-23.711 v1(41.84,-24.11)
  Secondary Side w0.135: A:U8.3@21.712,-9.045 23.026,-9.045 v1(23.026,-9.08) ; J1.78@35.336,-41.024 35.336,-39.023 v1(35.736,-38.623)
MCU_GPIO-30_L: J1.80 U1.T11 | length 25
  Primary Side w0.135: U1.T11@41.44,-21.31 v1(41.84,-21.71)
  Inner Layer 7 w0.14: v1(36.536,-37.823) 36.136,-37.423 36.132,-37.423 36.132,-36.842 35.4,-36.11 35.4,-34.364 36.132,-33.632 36.132,-32.621 37.441,-31.313 37.441,-28.092 40.272,-25.26 41.669,-25.26 42.241,-24.688 42.241,-23.113 42.038,-22.91 41.581,-22.91 41.39,-22.719 41.39,-22.16 v1(41.84,-21.71)
  Secondary Side w0.135: J1.80@36.136,-41.024 36.136,-38.223 ; 36.136,-38.223 v1(36.536,-37.823)
MCU_GPIO-31_L: J1.82 U1.U11 U2.1 | length 65.9
  Primary Side w0.135: U1.U11@41.44,-22.11 v1(41.84,-22.51) ; v1(61.609,-2.681) 61.625,-2.665 U2.1@61.625,-0.688
  Inner Layer 4 w0.14: v1(43.016,-3.29) 46.165,-3.29 46.775,-2.681 47.689,-2.681 48.604,-1.766 49.925,-1.766 51.144,-2.985 58.584,-2.985 58.889,-2.681 v1(61.609,-2.681)
  Inner Layer 7 w0.14: v1(37.336,-38.623) 36.936,-38.223 36.936,-36.136 37.158,-35.915 37.158,-33.967 36.936,-33.746 36.936,-32.617 37.885,-31.668 37.885,-28.054 40.259,-25.679 42.266,-25.679 v1(42.328,-25.742) ; v1(41.84,-22.51) 42.24,-22.11 42.24,-10.326 42.456,-10.11 42.863,-10.11 43.04,-9.933 43.04,-9.221 42.101,-8.282 42.101,-6.464 43.016,-5.55 v1(43.016,-3.29)
  Secondary Side w0.135: J1.82@36.936,-41.024 36.936,-39.023 ; 36.936,-39.023 v1(37.336,-38.623) ; v1(41.84,-22.51) 42.24,-22.91 42.24,-25.159 42.328,-25.248 v1(42.328,-25.742)
MCU_GPIO-32_L: J1.85 U1.U13 | length 26.1
  Primary Side w0.135: v1(38.136,-37.811) 38.535,-38.209 J1.85@38.535,-41.024 ; U1.U13@43.04,-22.11 v1(43.44,-22.51)
  Inner Layer 7 w0.14: v1(43.092,-26.764) 43.092,-26.282 43.422,-25.952 43.422,-25.375 43.84,-24.957 43.84,-22.91 v1(43.44,-22.51)
  Inner Layer 8 w0.14: v1(38.136,-37.811) 38.536,-37.404 38.536,-37.112 38.295,-36.871 37.609,-36.871 37.292,-36.553 37.292,-33.023 38.094,-32.221 42.777,-32.221 43.308,-31.69 43.308,-26.975 43.092,-26.759 v1(43.092,-26.764)
MCU_GPIO-33_L: J1.87 U1.T13 | length 27.8
  Primary Side w0.135: v1(38.937,-37.823) 39.335,-38.222 J1.87@39.335,-41.024 ; U1.T13@43.04,-21.31 v1(43.44,-21.71)
  Inner Layer 7 w0.14: v1(42.813,-25.26) 43.04,-25.032 43.04,-22.11 v1(43.44,-21.71)
  Inner Layer 8 w0.14: v1(38.937,-37.823) 39.32,-37.44 39.32,-36.782 39.053,-36.515 37.889,-36.515 37.635,-36.261 37.635,-33.213 38.278,-32.57 43.113,-32.57 43.613,-32.071 43.613,-25.59 43.283,-25.26 v1(42.813,-25.26)
MCU_GPIO-34: J1.86 U1.U14 U2.3 | length 64.9
  Primary Side w0.135: U1.U14@43.84,-22.11 v1(44.24,-22.51) ; U2.3@63.524,-0.688 63.524,-1.639 63.5,-1.639 63.5,-3.556 v1(63.539,-3.595)
  Inner Layer 4 w0.14: v1(44.133,-3.798) 44.54,-4.205 48.197,-4.205 48.807,-3.595 59.678,-3.595 59.681,-3.592 59.994,-3.592 60.194,-3.392 62.421,-3.392 62.625,-3.595 v1(63.539,-3.595)
  Inner Layer 7 w0.14: v1(38.937,-38.623) 38.536,-38.223 38.536,-36.508 43.625,-31.419 43.625,-26.682 44.641,-25.666 44.641,-22.911 v1(44.24,-22.51) 44.212,-22.482 43.84,-22.11 43.84,-8.573 42.813,-7.546 42.813,-6.643 44.133,-5.322 v1(44.133,-3.798)
  Secondary Side w0.135: J1.86@38.536,-41.024 38.536,-39.023 ; 38.536,-39.023 v1(38.937,-38.623)
MCU_GPIO-35: J1.121 U1.T14 | length 54.4
  Primary Side w0.135: U1.T14@43.84,-21.31 v1(44.24,-21.71) ; v1(73.191,-36.588) 73.597,-36.995 73.597,-37.972 73.203,-38.366 J1.121@73.203,-41.024
  Inner Layer 4 w0.14: v1(44.24,-21.71) 44.64,-21.31 44.64,-20.633 44.763,-20.51 48.82,-20.51 49.111,-20.219 49.111,-19.787 49.238,-19.66 49.862,-19.66 50.381,-20.18 53.037,-20.18 53.279,-20.422 54.635,-20.422 56.747,-18.31 61.621,-18.31 62.4,-19.089 68.807,-19.089 69.291,-18.605 70.676,-18.605 v1(71.083,-19.011)
  Inner Layer 8 w0.14: v1(71.083,-19.011) 71.083,-19.865 70.868,-20.081 70.868,-20.565 71.083,-20.78 71.083,-21.421 70.801,-21.703 70.801,-28.943 73.191,-31.333 v1(73.191,-36.588)
MCU_GPIO-36: J1.122 U1.V16 | length 48.4
  Primary Side w0.135: U1.V16@45.44,-22.91 v1(45.84,-23.31)
  Inner Layer 4 w0.127: 46.236,-23.706 48.829,-23.706
  Inner Layer 4 w0.14: v1(45.84,-23.31) 46.236,-23.706 ; 48.829,-23.706 54.12,-23.706 56.616,-21.21 62.355,-21.21 63.055,-20.51 69.102,-20.51 69.584,-20.993 v1(70.549,-20.993)
  Inner Layer 7 w0.14: v1(70.549,-20.993) 70.549,-21.348 70.801,-21.6 70.801,-28.636 73.597,-31.432 73.597,-37.198 v1(73.191,-37.604)
  Secondary Side w0.135: v1(73.191,-37.604) 73.203,-37.616 J1.122@73.203,-41.024
MCU_GPIO-37_L: J1.123 U1.U16 | length 50.1
  Primary Side w0.135: U1.U16@45.44,-22.11 v1(45.84,-22.51) ; J1.123@74.003,-41.024 74.003,-39.023 v1(74.403,-38.623)
  Inner Layer 4 w0.127: 46.243,-22.913 48.811,-22.913
  Inner Layer 4 w0.14: v1(45.84,-22.51) 46.243,-22.913 ; 48.811,-22.913 49.179,-23.282 53.909,-23.282 56.281,-20.91 61.934,-20.91 62.663,-20.181 69.382,-20.181 69.635,-20.434 v1(71.438,-20.434)
  Inner Layer 8 w0.14: v1(71.438,-20.434) 71.438,-21.821 71.201,-22.058 71.201,-28.886 74.003,-31.688 74.003,-38.223 v1(74.403,-38.623)
MCU_GPIO-38_L: J1.124 U1.T16 | length 50.4
  Primary Side w0.135: U1.T16@45.44,-21.31 v1(45.84,-21.71)
  Inner Layer 4 w0.14: v1(45.84,-21.71) 46.24,-22.11 48.811,-22.11 49.677,-22.977 53.833,-22.977 56.2,-20.61 61.742,-20.61 62.531,-19.821 69.498,-19.821 69.774,-19.545 v1(70.422,-19.545)
  Inner Layer 7 w0.14: v1(70.422,-19.545) 70.685,-19.807 70.685,-20.348 71.057,-20.721 71.057,-21.145 71.201,-21.289 71.201,-28.629 74.003,-31.431 74.003,-38.223 v1(73.603,-38.623)
  Secondary Side w0.127: J1.124@74.003,-41.024 J1.124@74.003,-40.361
  Secondary Side w0.135: v1(73.603,-38.623) 74.003,-39.023 J1.124@74.003,-40.361
MCU_GPIO-39_L: J1.88 U1.W17 | length 26.2
  Primary Side w0.135: U1.W17@46.24,-23.71 v1(46.64,-24.11)
  Inner Layer 7 w0.14: v1(41.337,-37.023) 41.337,-35.448 46.64,-30.145 46.64,-29.568 46.45,-29.378 45.623,-29.378 45.382,-29.136 45.382,-28.833 45.598,-28.617 46.334,-28.617 46.64,-28.311 46.64,-27.346 46.437,-27.143 45.623,-27.143 45.458,-26.977 45.458,-26.482 45.75,-26.19 46.488,-26.19 46.64,-26.038 46.64,-25.796 46.437,-25.593 45.953,-25.593 45.75,-25.39 45.75,-25.047 45.89,-24.907 46.475,-24.907 46.64,-24.742 v1(46.64,-24.11)
  Secondary Side w0.135: J1.88@39.336,-41.024 39.336,-38.223 ; 39.337,-38.223 40.537,-37.023 v1(41.337,-37.023)
MCU_GPIO-40_L: J1.89 U1.V17 | length 27.6
  Primary Side w0.135: v1(39.737,-38.623) 40.135,-39.022 J1.89@40.135,-41.024 ; U1.V17@46.24,-22.91 v1(46.64,-23.31)
  Inner Layer 8 w0.14: v1(39.737,-38.623) 40.137,-38.223 40.137,-36.706 39.616,-36.185 38.295,-36.185 38.067,-35.956 38.067,-33.353 38.511,-32.908 43.533,-32.908 46.661,-29.781 46.661,-29.008 47.231,-28.438 v1(47.231,-27.585)
  Secondary Side w0.135: v1(46.64,-23.31) 46.24,-23.71 46.24,-25.182 47.231,-26.174 v1(47.231,-27.585)
MCU_GPIO-41_L: J1.91 U1.U17 | length 30
  Primary Side w0.135: v1(40.537,-37.823) 40.935,-38.222 J1.91@40.935,-41.024 ; U1.U17@46.24,-22.11 v1(46.64,-22.51)
  Inner Layer 8 w0.14: v1(40.537,-37.823) 40.937,-37.423 40.937,-36.291 40.501,-35.855 38.778,-35.855 38.46,-35.537 38.46,-33.609 38.803,-33.266 43.962,-33.266 47.586,-29.641 v1(47.586,-29.185)
  Secondary Side w0.135: v1(46.64,-22.51) 46.24,-22.91 45.605,-22.91 45.44,-23.075 45.44,-25.209 46.47,-26.239 46.47,-28.079 47.359,-28.968 47.369,-28.968 v1(47.586,-29.185)
MCU_GPIO-42: J2.2 U1.D19 | length 23.3
  Primary Side w0.142: U1.D19@47.84,-11.71 v1(48.24,-11.31)
  Inner Layer 7 w0.142: v1(48.24,-11.31) 48.5,-11.05 56.439,-11.05 58.052,-12.662 58.052,-23.274 J2.2@56.935,-24.391
MCU_GPIO-43: J3.2 U1.C19 | length 23.9
  Primary Side w0.142: U1.C19@47.84,-10.91 v1(48.24,-10.51)
  Inner Layer 7 w0.14: v1(48.24,-10.51) 48.493,-10.763 56.61,-10.763
  Inner Layer 7 w0.142: 56.61,-10.763 58.357,-12.51 58.357,-23.273 J3.2@59.475,-24.391
MCU_GPIO-44_L: J1.90 U1.K18 | length 38.2
  Primary Side w0.135: U1.K18@47.04,-16.51 v1(47.44,-16.11)
  Inner Layer 3 w0.14: v1(44.716,-29.871) 49.847,-29.871 49.949,-29.973 v1(51.498,-29.973)
  Inner Layer 7 w0.14: v1(40.537,-38.623) 40.137,-38.223 40.137,-35.746 44.718,-31.165 44.718,-29.873 v1(44.716,-29.871)
  Inner Layer 8 w0.14: v1(47.44,-16.11) 47.94,-16.61 49.448,-16.61 51.447,-18.61 51.447,-20.244 50.19,-21.501 50.19,-27.941 51.498,-29.249 v1(51.498,-29.973)
  Secondary Side w0.135: J1.90@40.136,-41.024 40.136,-39.023 ; 40.137,-39.023 v1(40.537,-38.623)
MCU_GPIO-45_L: J1.92 U1.K19 | length 38.1
  Primary Side w0.135: U1.K19@47.84,-16.51 v1(48.24,-16.11)
  Inner Layer 3 w0.14: v1(45.326,-30.354) 47.637,-30.354 47.815,-30.176 49.466,-30.176 49.949,-30.659 v1(51.473,-30.659)
  Inner Layer 7 w0.14: v1(41.337,-37.823) 40.937,-37.423 40.937,-35.378 45.326,-30.989 v1(45.326,-30.354)
  Inner Layer 8 w0.14: v1(48.24,-16.11) 49.873,-16.11 51.752,-17.989 51.752,-20.409 50.571,-21.59 50.571,-27.534 52.082,-29.045 52.082,-30.049 v1(51.473,-30.659)
  Secondary Side w0.135: J1.92@40.936,-41.024 40.936,-38.223 ; 40.937,-38.223 v1(41.337,-37.823)
MCU_GPIO-46_L: J4.2 U1.E19 | length 26.7
  Primary Side w0.135: U1.E19@47.84,-12.51 48.17,-12.18 48.514,-12.18 48.87,-12.536 v1(48.87,-12.917)
  Inner Layer 3 w0.142: v1(48.87,-12.917) 50.393,-12.917 51.41,-11.9 58.662,-11.9 63.081,-16.32 63.081,-23.325 J4.2@62.015,-24.391
MCU_GPIO-47_L: J5.2 U1.E18 | length 27.6
  Primary Side w0.142: U1.E18@47.04,-12.51 v1(47.44,-12.11)
  Inner Layer 3 w0.142: v1(47.44,-12.11) 48.571,-12.11 48.895,-12.434 49.403,-12.434 50.242,-11.596 58.814,-11.596 63.386,-16.168 63.386,-23.222 J5.2@64.555,-24.391
MCU_GPIO-48_L: J1.99 U1.R16 | length 39.1
  Primary Side w0.135: v1(43.737,-38.623) 44.135,-39.021 J1.99@44.135,-41.024 ; U1.R16@45.44,-20.51 v1(45.84,-20.91)
  Inner Layer 3 w0.14: v1(45.84,-20.91) 46.24,-20.51 49.898,-20.51 50.801,-21.413 51.88,-21.413 52.185,-21.718 v1(52.54,-21.718)
  Inner Layer 4 w0.14: v1(48.476,-25.274) 48.972,-24.778 50.304,-24.778 51.345,-25.819 v1(53.885,-25.819)
  Inner Layer 7 w0.14: v1(52.54,-21.718) 52.54,-22.111 52.667,-22.238 52.667,-22.975 53.885,-24.193 v1(53.885,-25.819)
  Inner Layer 8 w0.14: v1(43.737,-38.623) 44.137,-38.223 44.137,-36.261 43.845,-35.969 43.075,-35.969 42.669,-35.563 42.669,-34.161 43.159,-33.67 44.65,-33.67 48.464,-29.856 48.464,-25.286 v1(48.476,-25.274)
MCU_GPIO-49_L: J1.101 U1.R17 | length 26.8
  Primary Side w0.135: v1(44.537,-37.823) 44.935,-38.221 J1.101@44.935,-41.024 ; U1.R17@46.24,-20.51 v1(46.64,-20.91)
  Inner Layer 8 w0.14: v1(44.537,-37.823) 44.937,-37.423 44.937,-36.134 44.429,-35.626 43.451,-35.626 43.108,-35.283 43.108,-34.267 43.429,-33.946 46.158,-33.946 48.389,-31.716 48.389,-30.723 v1(48.337,-30.671)
  Secondary Side w0.135: v1(46.64,-20.91) 47.04,-21.375 47.04,-25.285 47.867,-26.112 47.867,-27.698 48.337,-28.168 v1(48.337,-30.671)
MCU_GPIO-50_L: J1.103 U1.R18 | length 28.1
  Primary Side w0.135: v1(45.337,-38.623) 45.735,-39.021 J1.103@45.735,-41.024 ; U1.R18@47.04,-20.51 v1(47.44,-20.91)
  Inner Layer 8 w0.14: v1(45.337,-38.623) 45.737,-38.223 45.737,-36.071 45.001,-35.334 43.743,-35.334 43.502,-35.093 43.502,-34.397 43.655,-34.245 46.355,-34.245 48.794,-31.805 48.794,-26.428 49.035,-26.188 v1(49.035,-25.502)
  Secondary Side w0.135: v1(47.44,-20.91) 47.84,-21.337 47.84,-25.477 48.145,-25.782 48.705,-25.782 48.984,-25.502 v1(49.035,-25.502)
MCU_GPIO-51_L: J1.105 U1.R19 | length 28.3
  Primary Side w0.135: v1(46.137,-37.823) 46.535,-38.221 J1.105@46.535,-41.024 ; U1.R19@47.84,-20.51 v1(48.24,-20.91)
  Inner Layer 3 w0.14: v1(48.24,-20.91) 49.727,-20.91 v1(49.733,-20.904)
  Inner Layer 8 w0.14: v1(46.137,-37.823) 46.537,-37.423 46.537,-35.436 46.156,-35.055 44.239,-35.055 44.112,-34.928 44.112,-34.686 44.251,-34.547 46.538,-34.547 49.15,-31.935 49.15,-26.61 49.721,-26.038 49.721,-20.916 v1(49.733,-20.904)
MCU_GPIO-52_L: J1.107 U1.P16 | length 28.7
  Primary Side w0.135: U1.P16@45.44,-19.71 v1(45.84,-20.11) ; v1(46.938,-36.623) 47.335,-37.023 J1.107@47.335,-41.024
  Inner Layer 3 w0.14: v1(42.937,-36.623) v1(46.938,-36.623)
  Inner Layer 7 w0.14: v1(42.937,-36.623) 42.937,-34.508 46.983,-30.462 46.983,-28.646 47.764,-27.865 47.764,-26.569 47.129,-25.934 47.129,-23.912 46.927,-23.71 46.47,-23.71 46.242,-23.482 46.242,-20.512 v1(45.84,-20.11)
MCU_GPIO-53_L: J1.109 J9.41 U1.P17 | length 60.4
  Primary Side w0.135: U1.P17@46.24,-19.71 v1(46.64,-20.11) ; v1(47.738,-37.023) 48.135,-37.423 J1.109@48.135,-41.024
  Inner Layer 3 w0.14: v1(35.921,2.352) 36.724,1.396 41.593,1.396 42,0.99 v1(42,0.672) ; v1(43.737,-37.023) v1(47.738,-37.023)
  Inner Layer 7 w0.14: v1(42,0.672) 43.117,0.672 43.294,0.496 43.294,-0.723 43.652,-1.082 44.845,-1.082 46.369,-2.606 46.369,-3.771 46.24,-3.9 46.24,-7.151 46.075,-7.316 46.075,-8.332 46.24,-8.51 46.24,-19.749 v1(46.64,-20.11) 47.042,-20.512 47.042,-22.911 47.41,-23.279 47.41,-25.565 48.096,-26.25 48.096,-30.035 43.737,-34.394 v1(43.737,-37.023)
  Secondary Side w0.135: J9.41@35.92,1.352 v1(35.921,2.352) v1(35.921,2.352)